# Altium PCB FM375_LQFP64_SOCKET.PcbDoc (part 2 of 3)
Units mil, origin at the board's own origin, x right, y up, seen from the top; angles counter-clockwise.
Board outline 6000 x 4000 mil, 2 copper layers (Top Layer, Bottom Layer); 12 components, 66 nets, 201 pads, 0 vias.
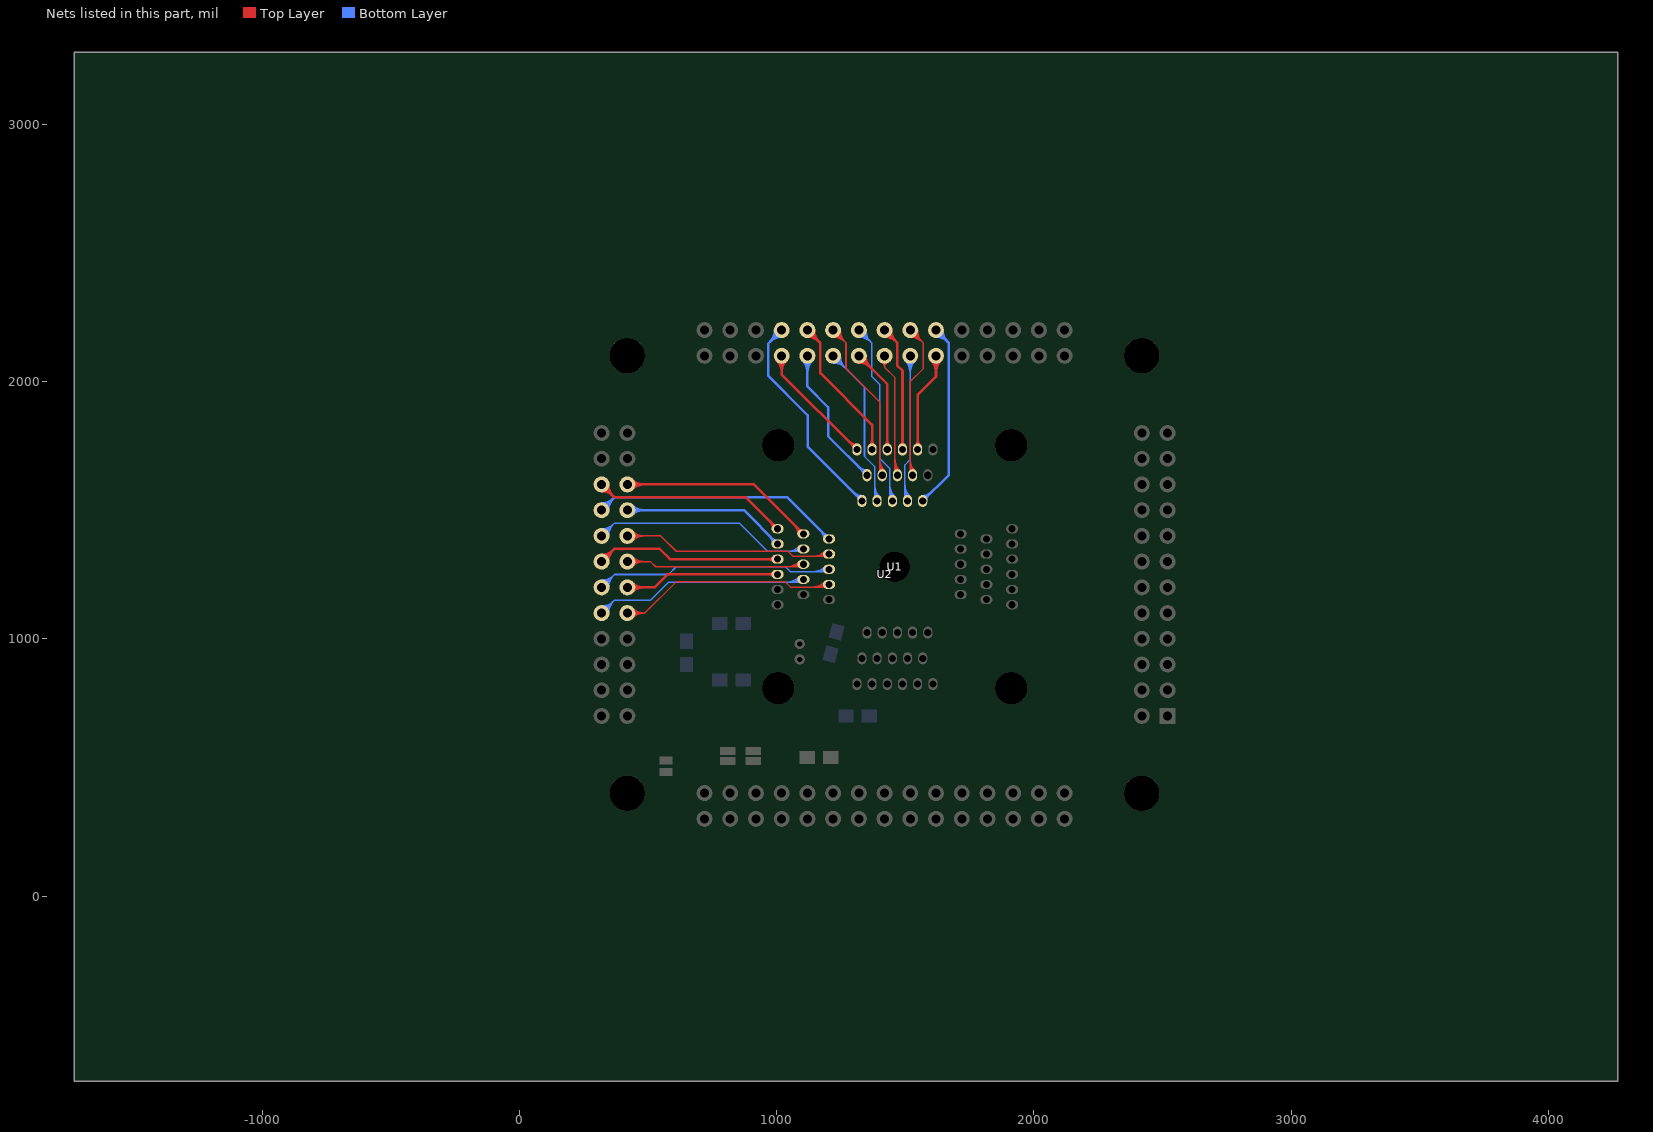
[diagram p2: the nets of this part, all layers, seen from the top]

## Nets (pads, with @x,y where several pads share a name; then routed paths per layer and width w, separated by ;. In a path a pad name is that pad's centre, name@x,y a point inside that pad or via, vN(x,y) a via of type N, cw(c..) or ccw(c..) an arc to the next point about the centre after c; other vN are vias at no path point) (continued)
PC2: U1.19 U2.35 | length 1556.9
  Bottom Layer w10: U1.19@1568.27,1535.91 1670,1637.64 1670,2150 U2.35@1620,2200 ; U1.19@1568.27,1554.53 ccw(c1568.27,1599.49) 1600.06,1567.7 ; U1.19@1568.27,1554.53 ccw(c1568.27,1599.49) 1600.06,1567.7 ; U1.19@1568.27,1554.53 ccw(c1568.27,1599.49) 1600.06,1567.7 ; U1.19@1568.27,1554.53 ccw(c1568.27,1599.49) 1600.06,1567.7 ; U1.19@1580.98,1541.81 cw(c1597.43,1541.81) 1585.8,1553.44 ; U1.19@1580.98,1541.81 cw(c1597.43,1541.81) 1585.8,1553.44 ; U1.19@1580.98,1541.81 cw(c1597.43,1541.81) 1585.8,1553.44 ; U1.19@1580.98,1541.81 cw(c1597.43,1541.81) 1585.8,1553.44 ; U2.35@1620,2174 cw(c1620,2111.23) 1664.38,2155.62 ; U2.35@1620,2174 cw(c1620,2111.23) 1664.38,2155.62 ; U2.35@1620,2174 cw(c1620,2111.23) 1664.38,2155.62 ; U2.35@1620,2174 cw(c1620,2111.23) 1664.38,2155.62 ; U2.35@1620,2184 cw(c1620,2145.37) 1647.31,2172.69 ; U2.35@1620,2184 cw(c1620,2145.37) 1647.31,2172.69 ; U2.35@1620,2184 cw(c1620,2145.37) 1647.31,2172.69 ; U2.35@1620,2184 cw(c1620,2145.37) 1647.31,2172.69 ; U2.35@1636,2200 ccw(c1674.63,2200) 1647.31,2172.69 ; U2.35@1636,2200 ccw(c1674.63,2200) 1647.31,2172.69 ; U2.35@1636,2200 ccw(c1674.63,2200) 1647.31,2172.69 ; U2.35@1636,2200 ccw(c1674.63,2200) 1647.31,2172.69 ; U2.35@1646,2200 ccw(c1708.77,2200) 1664.38,2155.62 ; U2.35@1646,2200 ccw(c1708.77,2200) 1664.38,2155.62 ; U2.35@1646,2200 ccw(c1708.77,2200) 1664.38,2155.62 ; U2.35@1646,2200 ccw(c1708.77,2200) 1664.38,2155.62
PC3: U1.20 U2.36 | length 1223.7
  Top Layer w10: U1.20@1548.58,1735.91 1548.58,1947.58 1620,2019 U2.36@1620,2100 ; U1.20@1539.59,1750.8 ccw(c1517.88,1772.51) 1548.58,1772.51 ; U1.20@1539.59,1750.8 ccw(c1517.88,1772.51) 1548.58,1772.51 ; U1.20@1539.59,1750.8 ccw(c1517.88,1772.51) 1548.58,1772.51 ; U1.20@1539.59,1750.8 ccw(c1517.88,1772.51) 1548.58,1772.51 ; 1548.58,1772.51 ccw(c1579.28,1772.51) U1.20@1557.57,1750.8 ; 1548.58,1772.51 ccw(c1579.28,1772.51) U1.20@1557.57,1750.8 ; 1548.58,1772.51 ccw(c1579.28,1772.51) U1.20@1557.57,1750.8 ; 1548.58,1772.51 ccw(c1579.28,1772.51) U1.20@1557.57,1750.8 ; U2.36@1601.62,2081.62 cw(c1557.23,2037.23) 1620,2037.23 ; U2.36@1601.62,2081.62 cw(c1557.23,2037.23) 1620,2037.23 ; U2.36@1601.62,2081.62 cw(c1557.23,2037.23) 1620,2037.23 ; U2.36@1601.62,2081.62 cw(c1557.23,2037.23) 1620,2037.23 ; U2.36@1608.69,2088.69 cw(c1581.37,2061.37) 1620,2061.37 ; U2.36@1608.69,2088.69 cw(c1581.37,2061.37) 1620,2061.37 ; U2.36@1608.69,2088.69 cw(c1581.37,2061.37) 1620,2061.37 ; U2.36@1608.69,2088.69 cw(c1581.37,2061.37) 1620,2061.37 ; 1620,2037.23 cw(c1682.77,2037.23) U2.36@1638.38,2081.62 ; 1620,2037.23 cw(c1682.77,2037.23) U2.36@1638.38,2081.62 ; 1620,2037.23 cw(c1682.77,2037.23) U2.36@1638.38,2081.62 ; 1620,2037.23 cw(c1682.77,2037.23) U2.36@1638.38,2081.62 ; 1620,2061.37 cw(c1658.63,2061.37) U2.36@1631.31,2088.69 ; 1620,2061.37 cw(c1658.63,2061.37) U2.36@1631.31,2088.69 ; 1620,2061.37 cw(c1658.63,2061.37) U2.36@1631.31,2088.69 ; 1620,2061.37 cw(c1658.63,2061.37) U2.36@1631.31,2088.69
PC4: U1.21 U2.37 | length 2222.7
  Top Layer w6: U1.21@1520,1644.8 U1.21@1528.9,1635.91 1519,1645.8 1519,1999 1571,2051 1571,2149 U2.37@1520,2200 ; 1519,1657.78 ccw(c1544.87,1657.78) U1.21@1526.58,1639.49 ; 1519,1657.78 ccw(c1544.87,1657.78) U1.21@1526.58,1639.49 ; 1519,1657.78 ccw(c1544.87,1657.78) U1.21@1526.58,1639.49 ; 1519,1657.78 ccw(c1544.87,1657.78) U1.21@1526.58,1639.49 ; 1519,1672.26 ccw(c1559.35,1672.26) U1.21@1530.82,1643.73 ; 1519,1672.26 ccw(c1559.35,1672.26) U1.21@1530.82,1643.73 ; 1519,1672.26 ccw(c1559.35,1672.26) U1.21@1530.82,1643.73 ; 1519,1672.26 ccw(c1559.35,1672.26) U1.21@1530.82,1643.73 ; 1519,1686.75 ccw(c1573.84,1686.75) U1.21@1535.06,1647.97 ; 1519,1686.75 ccw(c1573.84,1686.75) U1.21@1535.06,1647.97 ; 1519,1686.75 ccw(c1573.84,1686.75) U1.21@1535.06,1647.97 ; 1519,1686.75 ccw(c1573.84,1686.75) U1.21@1535.06,1647.97 ; 1519,1701.23 ccw(c1588.32,1701.23) U1.21@1539.3,1652.22 ; 1519,1701.23 ccw(c1588.32,1701.23) U1.21@1539.3,1652.22 ; 1519,1701.23 ccw(c1588.32,1701.23) U1.21@1539.3,1652.22 ; 1519,1701.23 ccw(c1588.32,1701.23) U1.21@1539.3,1652.22 ; U2.37@1520,2172 cw(c1520,2104.4) 1567.8,2152.2 ; U2.37@1520,2172 cw(c1520,2104.4) 1567.8,2152.2 ; U2.37@1520,2172 cw(c1520,2104.4) 1567.8,2152.2 ; U2.37@1520,2172 cw(c1520,2104.4) 1567.8,2152.2 ; U2.37@1520,2178 cw(c1520,2124.89) 1557.56,2162.44 ; U2.37@1520,2178 cw(c1520,2124.89) 1557.56,2162.44 ; U2.37@1520,2178 cw(c1520,2124.89) 1557.56,2162.44 ; U2.37@1520,2178 cw(c1520,2124.89) 1557.56,2162.44 ; U2.37@1520,2184 cw(c1520,2145.37) 1547.31,2172.69 ; U2.37@1520,2184 cw(c1520,2145.37) 1547.31,2172.69 ; U2.37@1520,2184 cw(c1520,2145.37) 1547.31,2172.69 ; U2.37@1520,2184 cw(c1520,2145.37) 1547.31,2172.69 ; U2.37@1536,2200 ccw(c1574.63,2200) 1547.31,2172.69 ; U2.37@1536,2200 ccw(c1574.63,2200) 1547.31,2172.69 ; U2.37@1536,2200 ccw(c1574.63,2200) 1547.31,2172.69 ; U2.37@1536,2200 ccw(c1574.63,2200) 1547.31,2172.69 ; U2.37@1542,2200 ccw(c1595.11,2200) 1557.56,2162.44 ; U2.37@1542,2200 ccw(c1595.11,2200) 1557.56,2162.44 ; U2.37@1542,2200 ccw(c1595.11,2200) 1557.56,2162.44 ; U2.37@1542,2200 ccw(c1595.11,2200) 1557.56,2162.44 ; U2.37@1548,2200 ccw(c1615.6,2200) 1567.8,2152.2 ; U2.37@1548,2200 ccw(c1615.6,2200) 1567.8,2152.2 ; U2.37@1548,2200 ccw(c1615.6,2200) 1567.8,2152.2 ; U2.37@1548,2200 ccw(c1615.6,2200) 1567.8,2152.2
PC5: U1.22 U2.38 | length 2209.1
  Bottom Layer w6: U1.22@1509.21,1535.91 1499,1546.12 1499,1676 1519,1696 1519,2099 U2.38@1520,2100 ; 1499,1558.54 ccw(c1525.94,1558.54) U1.22@1506.89,1539.49 ; 1499,1558.54 ccw(c1525.94,1558.54) U1.22@1506.89,1539.49 ; 1499,1558.54 ccw(c1525.94,1558.54) U1.22@1506.89,1539.49 ; 1499,1558.54 ccw(c1525.94,1558.54) U1.22@1506.89,1539.49 ; 1499,1573.02 ccw(c1540.43,1573.02) U1.22@1511.13,1543.73 ; 1499,1573.02 ccw(c1540.43,1573.02) U1.22@1511.13,1543.73 ; 1499,1573.02 ccw(c1540.43,1573.02) U1.22@1511.13,1543.73 ; 1499,1573.02 ccw(c1540.43,1573.02) U1.22@1511.13,1543.73 ; 1499,1587.51 ccw(c1554.91,1587.51) U1.22@1515.38,1547.97 ; 1499,1587.51 ccw(c1554.91,1587.51) U1.22@1515.38,1547.97 ; 1499,1587.51 ccw(c1554.91,1587.51) U1.22@1515.38,1547.97 ; 1499,1587.51 ccw(c1554.91,1587.51) U1.22@1515.38,1547.97 ; 1499,1602 ccw(c1569.4,1602) U1.22@1519.62,1552.22 ; 1499,1602 ccw(c1569.4,1602) U1.22@1519.62,1552.22 ; 1499,1602 ccw(c1569.4,1602) U1.22@1519.62,1552.22 ; 1499,1602 ccw(c1569.4,1602) U1.22@1519.62,1552.22 ; U2.38@1500.2,2080.2 cw(c1454.82,2034.82) 1519,2034.82 ; U2.38@1500.2,2080.2 cw(c1454.82,2034.82) 1519,2034.82 ; U2.38@1500.2,2080.2 cw(c1454.82,2034.82) 1519,2034.82 ; U2.38@1500.2,2080.2 cw(c1454.82,2034.82) 1519,2034.82 ; U2.38@1504.44,2084.44 cw(c1469.3,2049.3) 1519,2049.3 ; U2.38@1504.44,2084.44 cw(c1469.3,2049.3) 1519,2049.3 ; U2.38@1504.44,2084.44 cw(c1469.3,2049.3) 1519,2049.3 ; U2.38@1504.44,2084.44 cw(c1469.3,2049.3) 1519,2049.3 ; U2.38@1508.69,2088.69 cw(c1483.79,2063.79) 1519,2063.79 ; U2.38@1508.69,2088.69 cw(c1483.79,2063.79) 1519,2063.79 ; U2.38@1508.69,2088.69 cw(c1483.79,2063.79) 1519,2063.79 ; U2.38@1508.69,2088.69 cw(c1483.79,2063.79) 1519,2063.79 ; 1519,2029.99 cw(c1590.01,2029.99) U2.38@1539.8,2080.2 ; 1519,2029.99 cw(c1590.01,2029.99) U2.38@1539.8,2080.2 ; 1519,2029.99 cw(c1590.01,2029.99) U2.38@1539.8,2080.2 ; 1519,2029.99 cw(c1590.01,2029.99) U2.38@1539.8,2080.2 ; 1519,2044.47 cw(c1575.53,2044.47) U2.38@1535.56,2084.44 ; 1519,2044.47 cw(c1575.53,2044.47) U2.38@1535.56,2084.44 ; 1519,2044.47 cw(c1575.53,2044.47) U2.38@1535.56,2084.44 ; 1519,2044.47 cw(c1575.53,2044.47) U2.38@1535.56,2084.44 ; 1519,2058.96 cw(c1561.04,2058.96) U2.38@1531.31,2088.69 ; 1519,2058.96 cw(c1561.04,2058.96) U2.38@1531.31,2088.69 ; 1519,2058.96 cw(c1561.04,2058.96) U2.38@1531.31,2088.69 ; 1519,2058.96 cw(c1561.04,2058.96) U2.38@1531.31,2088.69
  Bottom Layer w10: U1.22@1509.21,1535.91 U1.22@1509.21,1555.21
PC6: U1.23 U2.39 | length 1322.9
  Top Layer w10: U2.39@1420,2200 1469,2151 1469,2063 1489.53,2042.47 U1.23@1489.53,1735.91 ; U2.39@1420,2174 cw(c1420,2111.23) 1464.38,2155.62 ; U2.39@1420,2174 cw(c1420,2111.23) 1464.38,2155.62 ; U2.39@1420,2174 cw(c1420,2111.23) 1464.38,2155.62 ; U2.39@1420,2174 cw(c1420,2111.23) 1464.38,2155.62 ; U2.39@1420,2184 cw(c1420,2145.37) 1447.31,2172.69 ; U2.39@1420,2184 cw(c1420,2145.37) 1447.31,2172.69 ; U2.39@1420,2184 cw(c1420,2145.37) 1447.31,2172.69 ; U2.39@1420,2184 cw(c1420,2145.37) 1447.31,2172.69 ; U2.39@1436,2200 ccw(c1474.63,2200) 1447.31,2172.69 ; U2.39@1436,2200 ccw(c1474.63,2200) 1447.31,2172.69 ; U2.39@1436,2200 ccw(c1474.63,2200) 1447.31,2172.69 ; U2.39@1436,2200 ccw(c1474.63,2200) 1447.31,2172.69 ; U2.39@1446,2200 ccw(c1508.77,2200) 1464.38,2155.62 ; U2.39@1446,2200 ccw(c1508.77,2200) 1464.38,2155.62 ; U2.39@1446,2200 ccw(c1508.77,2200) 1464.38,2155.62 ; U2.39@1446,2200 ccw(c1508.77,2200) 1464.38,2155.62 ; U1.23@1480.54,1750.8 ccw(c1458.83,1772.51) 1489.53,1772.51 ; U1.23@1480.54,1750.8 ccw(c1458.83,1772.51) 1489.53,1772.51 ; U1.23@1480.54,1750.8 ccw(c1458.83,1772.51) 1489.53,1772.51 ; U1.23@1480.54,1750.8 ccw(c1458.83,1772.51) 1489.53,1772.51 ; 1489.53,1772.51 ccw(c1520.23,1772.51) U1.23@1498.52,1750.8 ; 1489.53,1772.51 ccw(c1520.23,1772.51) U1.23@1498.52,1750.8 ; 1489.53,1772.51 ccw(c1520.23,1772.51) U1.23@1498.52,1750.8 ; 1489.53,1772.51 ccw(c1520.23,1772.51) U1.23@1498.52,1750.8
PC7: U1.24 U2.40 | length 1413.5
  Top Layer w6: U2.40@1420,2100 1420,2056 ; U1.24@1469.84,1635.91 1460,1645.75 1460,2016 1420,2056 ; U2.40@1408.14,2074.63 cw(c1399.43,2056) 1420,2056 ; U2.40@1408.14,2074.63 cw(c1399.43,2056) 1420,2056 ; U2.40@1408.14,2074.63 cw(c1399.43,2056) 1420,2056 ; U2.40@1408.14,2074.63 cw(c1399.43,2056) 1420,2056 ; U2.40@1410.68,2080.07 cw(c1403.84,2065.43) 1420,2065.43 ; U2.40@1410.68,2080.07 cw(c1403.84,2065.43) 1420,2065.43 ; U2.40@1410.68,2080.07 cw(c1403.84,2065.43) 1420,2065.43 ; U2.40@1410.68,2080.07 cw(c1403.84,2065.43) 1420,2065.43 ; 1420,2056 cw(c1440.57,2056) U2.40@1431.86,2074.63 ; 1420,2056 cw(c1440.57,2056) U2.40@1431.86,2074.63 ; 1420,2056 cw(c1440.57,2056) U2.40@1431.86,2074.63 ; 1420,2056 cw(c1440.57,2056) U2.40@1431.86,2074.63 ; 1420,2065.43 cw(c1436.16,2065.43) U2.40@1429.32,2080.07 ; 1420,2065.43 cw(c1436.16,2065.43) U2.40@1429.32,2080.07 ; 1420,2065.43 cw(c1436.16,2065.43) U2.40@1429.32,2080.07 ; 1420,2065.43 cw(c1436.16,2065.43) U2.40@1429.32,2080.07 ; 1460,1657.65 ccw(c1485.68,1657.65) U1.24@1467.52,1639.49 ; 1460,1657.65 ccw(c1485.68,1657.65) U1.24@1467.52,1639.49 ; 1460,1657.65 ccw(c1485.68,1657.65) U1.24@1467.52,1639.49 ; 1460,1657.65 ccw(c1485.68,1657.65) U1.24@1467.52,1639.49 ; 1460,1672.13 ccw(c1500.16,1672.13) U1.24@1471.76,1643.73 ; 1460,1672.13 ccw(c1500.16,1672.13) U1.24@1471.76,1643.73 ; 1460,1672.13 ccw(c1500.16,1672.13) U1.24@1471.76,1643.73 ; 1460,1672.13 ccw(c1500.16,1672.13) U1.24@1471.76,1643.73 ; 1460,1686.62 ccw(c1514.65,1686.62) U1.24@1476.01,1647.97 ; 1460,1686.62 ccw(c1514.65,1686.62) U1.24@1476.01,1647.97 ; 1460,1686.62 ccw(c1514.65,1686.62) U1.24@1476.01,1647.97 ; 1460,1686.62 ccw(c1514.65,1686.62) U1.24@1476.01,1647.97 ; 1460,1701.1 ccw(c1529.13,1701.1) U1.24@1480.25,1652.22 ; 1460,1701.1 ccw(c1529.13,1701.1) U1.24@1480.25,1652.22 ; 1460,1701.1 ccw(c1529.13,1701.1) U1.24@1480.25,1652.22 ; 1460,1701.1 ccw(c1529.13,1701.1) U1.24@1480.25,1652.22
PD0: U1.25 U2.41 | length 2328.4
  Bottom Layer w6: U2.41@1320,2200 1370,2150 1370,2020 1401,1989 1401,1701 1440,1662 1440,1546.06 U1.25@1450.16,1535.91 ; U2.41@1320,2172 cw(c1320,2104.4) 1367.8,2152.2 ; U2.41@1320,2172 cw(c1320,2104.4) 1367.8,2152.2 ; U2.41@1320,2172 cw(c1320,2104.4) 1367.8,2152.2 ; U2.41@1320,2172 cw(c1320,2104.4) 1367.8,2152.2 ; U2.41@1320,2178 cw(c1320,2124.89) 1357.56,2162.44 ; U2.41@1320,2178 cw(c1320,2124.89) 1357.56,2162.44 ; U2.41@1320,2178 cw(c1320,2124.89) 1357.56,2162.44 ; U2.41@1320,2178 cw(c1320,2124.89) 1357.56,2162.44 ; U2.41@1320,2184 cw(c1320,2145.37) 1347.31,2172.69 ; U2.41@1320,2184 cw(c1320,2145.37) 1347.31,2172.69 ; U2.41@1320,2184 cw(c1320,2145.37) 1347.31,2172.69 ; U2.41@1320,2184 cw(c1320,2145.37) 1347.31,2172.69 ; U2.41@1336,2200 ccw(c1374.63,2200) 1347.31,2172.69 ; U2.41@1336,2200 ccw(c1374.63,2200) 1347.31,2172.69 ; U2.41@1336,2200 ccw(c1374.63,2200) 1347.31,2172.69 ; U2.41@1336,2200 ccw(c1374.63,2200) 1347.31,2172.69 ; U2.41@1342,2200 ccw(c1395.11,2200) 1357.56,2162.44 ; U2.41@1342,2200 ccw(c1395.11,2200) 1357.56,2162.44 ; U2.41@1342,2200 ccw(c1395.11,2200) 1357.56,2162.44 ; U2.41@1342,2200 ccw(c1395.11,2200) 1357.56,2162.44 ; U2.41@1348,2200 ccw(c1415.6,2200) 1367.8,2152.2 ; U2.41@1348,2200 ccw(c1415.6,2200) 1367.8,2152.2 ; U2.41@1348,2200 ccw(c1415.6,2200) 1367.8,2152.2 ; U2.41@1348,2200 ccw(c1415.6,2200) 1367.8,2152.2 ; 1440,1558.41 ccw(c1466.75,1558.41) U1.25@1447.84,1539.49 ; 1440,1558.41 ccw(c1466.75,1558.41) U1.25@1447.84,1539.49 ; 1440,1558.41 ccw(c1466.75,1558.41) U1.25@1447.84,1539.49 ; 1440,1558.41 ccw(c1466.75,1558.41) U1.25@1447.84,1539.49 ; 1440,1572.89 ccw(c1481.24,1572.89) U1.25@1452.08,1543.73 ; 1440,1572.89 ccw(c1481.24,1572.89) U1.25@1452.08,1543.73 ; 1440,1572.89 ccw(c1481.24,1572.89) U1.25@1452.08,1543.73 ; 1440,1572.89 ccw(c1481.24,1572.89) U1.25@1452.08,1543.73 ; 1440,1587.38 ccw(c1495.72,1587.38) U1.25@1456.32,1547.97 ; 1440,1587.38 ccw(c1495.72,1587.38) U1.25@1456.32,1547.97 ; 1440,1587.38 ccw(c1495.72,1587.38) U1.25@1456.32,1547.97 ; 1440,1587.38 ccw(c1495.72,1587.38) U1.25@1456.32,1547.97 ; 1440,1601.86 ccw(c1510.21,1601.86) U1.25@1460.56,1552.22 ; 1440,1601.86 ccw(c1510.21,1601.86) U1.25@1460.56,1552.22 ; 1440,1601.86 ccw(c1510.21,1601.86) U1.25@1460.56,1552.22 ; 1440,1601.86 ccw(c1510.21,1601.86) U1.25@1460.56,1552.22
PD1: U1.26 U2.42 | length 1239.8
  Top Layer w10: U2.42@1320,2100 1430.47,1989.53 U1.26@1430.47,1735.91 ; U2.42@1320,2074 cw(c1320,2011.23) 1364.38,2055.62 ; U2.42@1320,2074 cw(c1320,2011.23) 1364.38,2055.62 ; U2.42@1320,2074 cw(c1320,2011.23) 1364.38,2055.62 ; U2.42@1320,2074 cw(c1320,2011.23) 1364.38,2055.62 ; U2.42@1320,2084 cw(c1320,2045.37) 1347.31,2072.69 ; U2.42@1320,2084 cw(c1320,2045.37) 1347.31,2072.69 ; U2.42@1320,2084 cw(c1320,2045.37) 1347.31,2072.69 ; U2.42@1320,2084 cw(c1320,2045.37) 1347.31,2072.69 ; U2.42@1336,2100 ccw(c1374.63,2100) 1347.31,2072.69 ; U2.42@1336,2100 ccw(c1374.63,2100) 1347.31,2072.69 ; U2.42@1336,2100 ccw(c1374.63,2100) 1347.31,2072.69 ; U2.42@1336,2100 ccw(c1374.63,2100) 1347.31,2072.69 ; U2.42@1346,2100 ccw(c1408.77,2100) 1364.38,2055.62 ; U2.42@1346,2100 ccw(c1408.77,2100) 1364.38,2055.62 ; U2.42@1346,2100 ccw(c1408.77,2100) 1364.38,2055.62 ; U2.42@1346,2100 ccw(c1408.77,2100) 1364.38,2055.62 ; U1.26@1421.48,1750.8 ccw(c1399.77,1772.51) 1430.47,1772.51 ; U1.26@1421.48,1750.8 ccw(c1399.77,1772.51) 1430.47,1772.51 ; U1.26@1421.48,1750.8 ccw(c1399.77,1772.51) 1430.47,1772.51 ; U1.26@1421.48,1750.8 ccw(c1399.77,1772.51) 1430.47,1772.51 ; 1430.47,1772.51 ccw(c1461.17,1772.51) U1.26@1439.46,1750.8 ; 1430.47,1772.51 ccw(c1461.17,1772.51) U1.26@1439.46,1750.8 ; 1430.47,1772.51 ccw(c1461.17,1772.51) U1.26@1439.46,1750.8 ; 1430.47,1772.51 ccw(c1461.17,1772.51) U1.26@1439.46,1750.8
PD2: U1.27 U2.43 | length 2250
  Top Layer w6: U2.43@1220,2200 1270,2150 1270,2052 1401,1921 1401,1645.69 U1.27@1410.79,1635.91 U1.27@1402,1644.69 ; U2.43@1220,2172 cw(c1220,2104.4) 1267.8,2152.2 ; U2.43@1220,2172 cw(c1220,2104.4) 1267.8,2152.2 ; U2.43@1220,2172 cw(c1220,2104.4) 1267.8,2152.2 ; U2.43@1220,2172 cw(c1220,2104.4) 1267.8,2152.2 ; U2.43@1220,2178 cw(c1220,2124.89) 1257.56,2162.44 ; U2.43@1220,2178 cw(c1220,2124.89) 1257.56,2162.44 ; U2.43@1220,2178 cw(c1220,2124.89) 1257.56,2162.44 ; U2.43@1220,2178 cw(c1220,2124.89) 1257.56,2162.44 ; U2.43@1220,2184 cw(c1220,2145.37) 1247.31,2172.69 ; U2.43@1220,2184 cw(c1220,2145.37) 1247.31,2172.69 ; U2.43@1220,2184 cw(c1220,2145.37) 1247.31,2172.69 ; U2.43@1220,2184 cw(c1220,2145.37) 1247.31,2172.69 ; U2.43@1236,2200 ccw(c1274.63,2200) 1247.31,2172.69 ; U2.43@1236,2200 ccw(c1274.63,2200) 1247.31,2172.69 ; U2.43@1236,2200 ccw(c1274.63,2200) 1247.31,2172.69 ; U2.43@1236,2200 ccw(c1274.63,2200) 1247.31,2172.69 ; U2.43@1242,2200 ccw(c1295.11,2200) 1257.56,2162.44 ; U2.43@1242,2200 ccw(c1295.11,2200) 1257.56,2162.44 ; U2.43@1242,2200 ccw(c1295.11,2200) 1257.56,2162.44 ; U2.43@1242,2200 ccw(c1295.11,2200) 1257.56,2162.44 ; U2.43@1248,2200 ccw(c1315.6,2200) 1267.8,2152.2 ; U2.43@1248,2200 ccw(c1315.6,2200) 1267.8,2152.2 ; U2.43@1248,2200 ccw(c1315.6,2200) 1267.8,2152.2 ; U2.43@1248,2200 ccw(c1315.6,2200) 1267.8,2152.2 ; 1401,1657.51 ccw(c1426.49,1657.51) U1.27@1408.47,1639.49 ; 1401,1657.51 ccw(c1426.49,1657.51) U1.27@1408.47,1639.49 ; 1401,1657.51 ccw(c1426.49,1657.51) U1.27@1408.47,1639.49 ; 1401,1657.51 ccw(c1426.49,1657.51) U1.27@1408.47,1639.49 ; 1401,1672 ccw(c1440.97,1672) U1.27@1412.71,1643.73 ; 1401,1672 ccw(c1440.97,1672) U1.27@1412.71,1643.73 ; 1401,1672 ccw(c1440.97,1672) U1.27@1412.71,1643.73 ; 1401,1672 ccw(c1440.97,1672) U1.27@1412.71,1643.73 ; 1401,1686.48 ccw(c1455.46,1686.48) U1.27@1416.95,1647.97 ; 1401,1686.48 ccw(c1455.46,1686.48) U1.27@1416.95,1647.97 ; 1401,1686.48 ccw(c1455.46,1686.48) U1.27@1416.95,1647.97 ; 1401,1686.48 ccw(c1455.46,1686.48) U1.27@1416.95,1647.97 ; 1401,1700.97 ccw(c1469.94,1700.97) U1.27@1421.19,1652.22 ; 1401,1700.97 ccw(c1469.94,1700.97) U1.27@1421.19,1652.22 ; 1401,1700.97 ccw(c1469.94,1700.97) U1.27@1421.19,1652.22 ; 1401,1700.97 ccw(c1469.94,1700.97) U1.27@1421.19,1652.22
PD3: U1.28 U2.44 | length 2259
  Bottom Layer w6: U2.44@1220,2100 1342,1978 1342,1709 1381,1670 1381,1546.01 U1.28@1391.1,1535.91 ; U2.44@1220,2072 cw(c1220,2004.4) 1267.8,2052.2 ; U2.44@1220,2072 cw(c1220,2004.4) 1267.8,2052.2 ; U2.44@1220,2072 cw(c1220,2004.4) 1267.8,2052.2 ; U2.44@1220,2072 cw(c1220,2004.4) 1267.8,2052.2 ; U2.44@1220,2078 cw(c1220,2024.89) 1257.56,2062.44 ; U2.44@1220,2078 cw(c1220,2024.89) 1257.56,2062.44 ; U2.44@1220,2078 cw(c1220,2024.89) 1257.56,2062.44 ; U2.44@1220,2078 cw(c1220,2024.89) 1257.56,2062.44 ; U2.44@1220,2084 cw(c1220,2045.37) 1247.31,2072.69 ; U2.44@1220,2084 cw(c1220,2045.37) 1247.31,2072.69 ; U2.44@1220,2084 cw(c1220,2045.37) 1247.31,2072.69 ; U2.44@1220,2084 cw(c1220,2045.37) 1247.31,2072.69 ; U2.44@1236,2100 ccw(c1274.63,2100) 1247.31,2072.69 ; U2.44@1236,2100 ccw(c1274.63,2100) 1247.31,2072.69 ; U2.44@1236,2100 ccw(c1274.63,2100) 1247.31,2072.69 ; U2.44@1236,2100 ccw(c1274.63,2100) 1247.31,2072.69 ; U2.44@1242,2100 ccw(c1295.11,2100) 1257.56,2062.44 ; U2.44@1242,2100 ccw(c1295.11,2100) 1257.56,2062.44 ; U2.44@1242,2100 ccw(c1295.11,2100) 1257.56,2062.44 ; U2.44@1242,2100 ccw(c1295.11,2100) 1257.56,2062.44 ; U2.44@1248,2100 ccw(c1315.6,2100) 1267.8,2052.2 ; U2.44@1248,2100 ccw(c1315.6,2100) 1267.8,2052.2 ; U2.44@1248,2100 ccw(c1315.6,2100) 1267.8,2052.2 ; U2.44@1248,2100 ccw(c1315.6,2100) 1267.8,2052.2 ; 1381,1558.27 ccw(c1407.56,1558.27) U1.28@1388.78,1539.49 ; 1381,1558.27 ccw(c1407.56,1558.27) U1.28@1388.78,1539.49 ; 1381,1558.27 ccw(c1407.56,1558.27) U1.28@1388.78,1539.49 ; 1381,1558.27 ccw(c1407.56,1558.27) U1.28@1388.78,1539.49 ; 1381,1572.76 ccw(c1422.05,1572.76) U1.28@1393.02,1543.73 ; 1381,1572.76 ccw(c1422.05,1572.76) U1.28@1393.02,1543.73 ; 1381,1572.76 ccw(c1422.05,1572.76) U1.28@1393.02,1543.73 ; 1381,1572.76 ccw(c1422.05,1572.76) U1.28@1393.02,1543.73 ; 1381,1587.24 ccw(c1436.54,1587.24) U1.28@1397.27,1547.97 ; 1381,1587.24 ccw(c1436.54,1587.24) U1.28@1397.27,1547.97 ; 1381,1587.24 ccw(c1436.54,1587.24) U1.28@1397.27,1547.97 ; 1381,1587.24 ccw(c1436.54,1587.24) U1.28@1397.27,1547.97 ; 1381,1601.73 ccw(c1451.02,1601.73) U1.28@1401.51,1552.22 ; 1381,1601.73 ccw(c1451.02,1601.73) U1.28@1401.51,1552.22 ; 1381,1601.73 ccw(c1451.02,1601.73) U1.28@1401.51,1552.22 ; 1381,1601.73 ccw(c1451.02,1601.73) U1.28@1401.51,1552.22
  Bottom Layer w10: U1.28@1391.1,1535.91 U1.28@1391.1,1551.9
PD4: U1.29 U2.45 | length 1398.2
  Top Layer w10: U2.45@1120,2200 1170,2150 1170,2033 1371.42,1831.58 U1.29@1371.42,1735.91 ; U2.45@1120,2174 cw(c1120,2111.23) 1164.38,2155.62 ; U2.45@1120,2174 cw(c1120,2111.23) 1164.38,2155.62 ; U2.45@1120,2174 cw(c1120,2111.23) 1164.38,2155.62 ; U2.45@1120,2174 cw(c1120,2111.23) 1164.38,2155.62 ; U2.45@1120,2184 cw(c1120,2145.37) 1147.31,2172.69 ; U2.45@1120,2184 cw(c1120,2145.37) 1147.31,2172.69 ; U2.45@1120,2184 cw(c1120,2145.37) 1147.31,2172.69 ; U2.45@1120,2184 cw(c1120,2145.37) 1147.31,2172.69 ; U2.45@1136,2200 ccw(c1174.63,2200) 1147.31,2172.69 ; U2.45@1136,2200 ccw(c1174.63,2200) 1147.31,2172.69 ; U2.45@1136,2200 ccw(c1174.63,2200) 1147.31,2172.69 ; U2.45@1136,2200 ccw(c1174.63,2200) 1147.31,2172.69 ; U2.45@1146,2200 ccw(c1208.77,2200) 1164.38,2155.62 ; U2.45@1146,2200 ccw(c1208.77,2200) 1164.38,2155.62 ; U2.45@1146,2200 ccw(c1208.77,2200) 1164.38,2155.62 ; U2.45@1146,2200 ccw(c1208.77,2200) 1164.38,2155.62 ; U1.29@1362.43,1750.8 ccw(c1340.72,1772.51) 1371.42,1772.51 ; U1.29@1362.43,1750.8 ccw(c1340.72,1772.51) 1371.42,1772.51 ; U1.29@1362.43,1750.8 ccw(c1340.72,1772.51) 1371.42,1772.51 ; U1.29@1362.43,1750.8 ccw(c1340.72,1772.51) 1371.42,1772.51 ; 1371.42,1772.51 ccw(c1402.12,1772.51) U1.29@1380.41,1750.8 ; 1371.42,1772.51 ccw(c1402.12,1772.51) U1.29@1380.41,1750.8 ; 1371.42,1772.51 ccw(c1402.12,1772.51) U1.29@1380.41,1750.8 ; 1371.42,1772.51 ccw(c1402.12,1772.51) U1.29@1380.41,1750.8
PD5: U1.30 U2.46 | length 1403.8
  Top Layer w6: U1.30@1342,1645.64 U1.30@1351.73,1635.91
  Bottom Layer w10: U2.46@1120,2100 1120,1981 1201,1900 1201,1786.64 U1.30@1351.73,1635.91 ; U2.46@1101.62,2081.62 cw(c1057.23,2037.23) 1120,2037.23 ; U2.46@1101.62,2081.62 cw(c1057.23,2037.23) 1120,2037.23 ; U2.46@1101.62,2081.62 cw(c1057.23,2037.23) 1120,2037.23 ; U2.46@1101.62,2081.62 cw(c1057.23,2037.23) 1120,2037.23 ; U2.46@1108.69,2088.69 cw(c1081.37,2061.37) 1120,2061.37 ; U2.46@1108.69,2088.69 cw(c1081.37,2061.37) 1120,2061.37 ; U2.46@1108.69,2088.69 cw(c1081.37,2061.37) 1120,2061.37 ; U2.46@1108.69,2088.69 cw(c1081.37,2061.37) 1120,2061.37 ; 1120,2037.23 cw(c1182.77,2037.23) U2.46@1138.38,2081.62 ; 1120,2037.23 cw(c1182.77,2037.23) U2.46@1138.38,2081.62 ; 1120,2037.23 cw(c1182.77,2037.23) U2.46@1138.38,2081.62 ; 1120,2037.23 cw(c1182.77,2037.23) U2.46@1138.38,2081.62 ; 1120,2061.37 cw(c1158.63,2061.37) U2.46@1131.31,2088.69 ; 1120,2061.37 cw(c1158.63,2061.37) U2.46@1131.31,2088.69 ; 1120,2061.37 cw(c1158.63,2061.37) U2.46@1131.31,2088.69 ; 1120,2061.37 cw(c1158.63,2061.37) U2.46@1131.31,2088.69 ; 1319.94,1667.7 ccw(c1351.73,1699.49) U1.30@1351.73,1654.53 ; 1319.94,1667.7 ccw(c1351.73,1699.49) U1.30@1351.73,1654.53 ; 1319.94,1667.7 ccw(c1351.73,1699.49) U1.30@1351.73,1654.53 ; 1319.94,1667.7 ccw(c1351.73,1699.49) U1.30@1351.73,1654.53 ; 1334.2,1653.44 cw(c1322.57,1641.81) U1.30@1339.02,1641.81 ; 1334.2,1653.44 cw(c1322.57,1641.81) U1.30@1339.02,1641.81 ; 1334.2,1653.44 cw(c1322.57,1641.81) U1.30@1339.02,1641.81 ; 1334.2,1653.44 cw(c1322.57,1641.81) U1.30@1339.02,1641.81
PD6: U1.31 U2.47 | length 1667.2
  Bottom Layer w10: U2.47@1020,2200 967,2147 967,2023 1121,1869 1121,1746.95 U1.31@1332.05,1535.91 ; 975.62,2155.62 cw(c1020,2111.23) U2.47@1020,2174 ; 975.62,2155.62 ccw(c931.23,2200) U2.47@994,2200 ; 975.62,2155.62 cw(c1020,2111.23) U2.47@1020,2174 ; 975.62,2155.62 ccw(c931.23,2200) U2.47@994,2200 ; 975.62,2155.62 ccw(c931.23,2200) U2.47@994,2200 ; 975.62,2155.62 cw(c1020,2111.23) U2.47@1020,2174 ; 975.62,2155.62 ccw(c931.23,2200) U2.47@994,2200 ; 975.62,2155.62 cw(c1020,2111.23) U2.47@1020,2174 ; 992.69,2172.69 cw(c1020,2145.37) U2.47@1020,2184 ; 992.69,2172.69 ccw(c965.37,2200) U2.47@1004,2200 ; 992.69,2172.69 cw(c1020,2145.37) U2.47@1020,2184 ; 992.69,2172.69 ccw(c965.37,2200) U2.47@1004,2200 ; 992.69,2172.69 ccw(c965.37,2200) U2.47@1004,2200 ; 992.69,2172.69 cw(c1020,2145.37) U2.47@1020,2184 ; 992.69,2172.69 ccw(c965.37,2200) U2.47@1004,2200 ; 992.69,2172.69 cw(c1020,2145.37) U2.47@1020,2184 ; 1300.26,1567.7 ccw(c1332.05,1599.49) U1.31@1332.05,1554.53 ; 1300.26,1567.7 ccw(c1332.05,1599.49) U1.31@1332.05,1554.53 ; 1300.26,1567.7 ccw(c1332.05,1599.49) U1.31@1332.05,1554.53 ; 1300.26,1567.7 ccw(c1332.05,1599.49) U1.31@1332.05,1554.53 ; 1314.51,1553.44 cw(c1302.89,1541.81) U1.31@1319.33,1541.81 ; 1314.51,1553.44 cw(c1302.89,1541.81) U1.31@1319.33,1541.81 ; 1314.51,1553.44 cw(c1302.89,1541.81) U1.31@1319.33,1541.81 ; 1314.51,1553.44 cw(c1302.89,1541.81) U1.31@1319.33,1541.81
PD7: U1.32 U2.48 | length 1315.2
  Top Layer w10: U2.48@1020,2100 1020,2028.27 U1.32@1312.36,1735.91 ; U2.48@1001.62,2081.62 cw(c957.23,2037.23) 1020,2037.23 ; U2.48@1001.62,2081.62 cw(c957.23,2037.23) 1020,2037.23 ; U2.48@1001.62,2081.62 cw(c957.23,2037.23) 1020,2037.23 ; U2.48@1001.62,2081.62 cw(c957.23,2037.23) 1020,2037.23 ; U2.48@1008.69,2088.69 cw(c981.37,2061.37) 1020,2061.37 ; U2.48@1008.69,2088.69 cw(c981.37,2061.37) 1020,2061.37 ; U2.48@1008.69,2088.69 cw(c981.37,2061.37) 1020,2061.37 ; U2.48@1008.69,2088.69 cw(c981.37,2061.37) 1020,2061.37 ; 1020,2037.23 cw(c1082.77,2037.23) U2.48@1038.38,2081.62 ; 1020,2037.23 cw(c1082.77,2037.23) U2.48@1038.38,2081.62 ; 1020,2037.23 cw(c1082.77,2037.23) U2.48@1038.38,2081.62 ; 1020,2037.23 cw(c1082.77,2037.23) U2.48@1038.38,2081.62 ; 1020,2061.37 cw(c1058.63,2061.37) U2.48@1031.31,2088.69 ; 1020,2061.37 cw(c1058.63,2061.37) U2.48@1031.31,2088.69 ; 1020,2061.37 cw(c1058.63,2061.37) U2.48@1031.31,2088.69 ; 1020,2061.37 cw(c1058.63,2061.37) U2.48@1031.31,2088.69 ; 1280.57,1767.7 ccw(c1312.36,1799.49) U1.32@1312.36,1754.53 ; 1280.57,1767.7 ccw(c1312.36,1799.49) U1.32@1312.36,1754.53 ; 1280.57,1767.7 ccw(c1312.36,1799.49) U1.32@1312.36,1754.53 ; 1280.57,1767.7 ccw(c1312.36,1799.49) U1.32@1312.36,1754.53 ; 1294.83,1753.44 cw(c1283.2,1741.81) U1.32@1299.65,1741.81 ; 1294.83,1753.44 cw(c1283.2,1741.81) U1.32@1299.65,1741.81 ; 1294.83,1753.44 cw(c1283.2,1741.81) U1.32@1299.65,1741.81 ; 1294.83,1753.44 cw(c1283.2,1741.81) U1.32@1299.65,1741.81
PE0: U1.33 U2.59 | length 963
  Top Layer w10: U2.59@320,1574 cw(c320,1511.23) 364.38,1555.62 cw(c408.77,1600) U2.59@346,1600 ; U2.59@320,1584 cw(c320,1545.37) 347.31,1572.69 cw(c374.63,1600) U2.59@336,1600 ; U2.59@320,1600 370,1550 881.73,1550 U1.33@1004.09,1427.64 ; 972.3,1459.43 cw(c940.51,1427.64) U1.33@985.47,1427.64 ; 986.56,1445.17 ccw(c998.19,1456.8) U1.33@998.19,1440.35
PE1: U1.34 U2.60 | length 971.1
  Top Layer w10: U2.60@420,1600 912.05,1600 U1.34@1104.09,1407.95 ; U2.60@431.31,1588.69 cw(c458.63,1561.37) 458.63,1600 cw(c458.63,1638.63) U2.60@431.31,1611.31 ; U2.60@438.38,1581.62 cw(c482.77,1537.23) 482.77,1600 cw(c482.77,1662.77) U2.60@438.38,1618.38 ; 1072.3,1439.74 cw(c1040.51,1407.95) U1.34@1085.47,1407.95 ; 1086.56,1425.49 ccw(c1098.19,1437.11) U1.34@1098.19,1420.67
PE2: U1.35 U2.61 | length 1179.3
  Bottom Layer w10: U2.61@320,1500 370,1550 1042.36,1550 U1.35@1204.09,1388.27 ; U2.61@320,1516 ccw(c320,1554.63) 347.31,1527.31 ccw(c374.63,1500) U2.61@336,1500 ; U2.61@320,1526 ccw(c320,1588.77) 364.38,1544.38 ccw(c408.77,1500) U2.61@346,1500 ; 1172.3,1420.06 cw(c1140.51,1388.27) U1.35@1185.47,1388.27 ; 1186.56,1405.8 ccw(c1198.19,1417.43) U1.35@1198.19,1400.98
PE3: U1.36 U2.62 | length 1468.5
  Bottom Layer w10: U2.62@420,1500 872.68,1500 U1.36@1004.09,1368.58 ; U2.62@431.31,1488.69 cw(c458.63,1461.37) 458.63,1500 ; U2.62@431.31,1488.69 cw(c458.63,1461.37) 458.63,1500 ; U2.62@431.31,1488.69 cw(c458.63,1461.37) 458.63,1500 ; U2.62@431.31,1488.69 cw(c458.63,1461.37) 458.63,1500 ; U2.62@431.31,1511.31 ccw(c458.63,1538.63) 458.63,1500 ; U2.62@431.31,1511.31 ccw(c458.63,1538.63) 458.63,1500 ; U2.62@431.31,1511.31 ccw(c458.63,1538.63) 458.63,1500 ; U2.62@431.31,1511.31 ccw(c458.63,1538.63) 458.63,1500 ; U2.62@438.38,1481.62 cw(c482.77,1437.23) 482.77,1500 ; U2.62@438.38,1481.62 cw(c482.77,1437.23) 482.77,1500 ; U2.62@438.38,1481.62 cw(c482.77,1437.23) 482.77,1500 ; U2.62@438.38,1481.62 cw(c482.77,1437.23) 482.77,1500 ; U2.62@438.38,1518.38 ccw(c482.77,1562.77) 482.77,1500 ; U2.62@438.38,1518.38 ccw(c482.77,1562.77) 482.77,1500 ; U2.62@438.38,1518.38 ccw(c482.77,1562.77) 482.77,1500 ; U2.62@438.38,1518.38 ccw(c482.77,1562.77) 482.77,1500 ; 972.3,1400.37 cw(c940.51,1368.58) U1.36@985.47,1368.58 ; 972.3,1400.37 cw(c940.51,1368.58) U1.36@985.47,1368.58 ; 972.3,1400.37 cw(c940.51,1368.58) U1.36@985.47,1368.58 ; 972.3,1400.37 cw(c940.51,1368.58) U1.36@985.47,1368.58 ; 986.56,1386.12 ccw(c998.19,1397.74) U1.36@998.19,1381.3 ; 986.56,1386.12 ccw(c998.19,1397.74) U1.36@998.19,1381.3 ; 986.56,1386.12 ccw(c998.19,1397.74) U1.36@998.19,1381.3 ; 986.56,1386.12 ccw(c998.19,1397.74) U1.36@998.19,1381.3
PE4: U1.37 U2.63 | length 2339.8
  Bottom Layer w6: U2.63@320,1400 370,1450 855,1450 965,1340 1095.2,1340 U1.37@1104.09,1348.9 ; U2.63@320,1416 ccw(c320,1454.63) 347.31,1427.31 ; U2.63@320,1416 ccw(c320,1454.63) 347.31,1427.31 ; U2.63@320,1416 ccw(c320,1454.63) 347.31,1427.31 ; U2.63@320,1416 ccw(c320,1454.63) 347.31,1427.31 ; U2.63@320,1422 ccw(c320,1475.11) 357.56,1437.56 ; U2.63@320,1422 ccw(c320,1475.11) 357.56,1437.56 ; U2.63@320,1422 ccw(c320,1475.11) 357.56,1437.56 ; U2.63@320,1422 ccw(c320,1475.11) 357.56,1437.56 ; U2.63@320,1428 ccw(c320,1495.6) 367.8,1447.8 ; U2.63@320,1428 ccw(c320,1495.6) 367.8,1447.8 ; U2.63@320,1428 ccw(c320,1495.6) 367.8,1447.8 ; U2.63@320,1428 ccw(c320,1495.6) 367.8,1447.8 ; U2.63@336,1400 cw(c374.63,1400) 347.31,1427.31 ; U2.63@336,1400 cw(c374.63,1400) 347.31,1427.31 ; U2.63@336,1400 cw(c374.63,1400) 347.31,1427.31 ; U2.63@336,1400 cw(c374.63,1400) 347.31,1427.31 ; U2.63@342,1400 cw(c395.11,1400) 357.56,1437.56 ; U2.63@342,1400 cw(c395.11,1400) 357.56,1437.56 ; U2.63@342,1400 cw(c395.11,1400) 357.56,1437.56 ; U2.63@342,1400 cw(c395.11,1400) 357.56,1437.56 ; U2.63@348,1400 cw(c415.6,1400) 367.8,1447.8 ; U2.63@348,1400 cw(c415.6,1400) 367.8,1447.8 ; U2.63@348,1400 cw(c415.6,1400) 367.8,1447.8 ; U2.63@348,1400 cw(c415.6,1400) 367.8,1447.8 ; 1041.18,1340 ccw(c1041.18,1405.91) U1.37@1087.78,1359.3 ; 1041.18,1340 ccw(c1041.18,1405.91) U1.37@1087.78,1359.3 ; 1041.18,1340 ccw(c1041.18,1405.91) U1.37@1087.78,1359.3 ; 1041.18,1340 ccw(c1041.18,1405.91) U1.37@1087.78,1359.3 ; 1055.66,1340 ccw(c1055.66,1391.42) U1.37@1092.03,1355.06 ; 1055.66,1340 ccw(c1055.66,1391.42) U1.37@1092.03,1355.06 ; 1055.66,1340 ccw(c1055.66,1391.42) U1.37@1092.03,1355.06 ; 1055.66,1340 ccw(c1055.66,1391.42) U1.37@1092.03,1355.06 ; 1070.15,1340 ccw(c1070.15,1376.94) U1.37@1096.27,1350.82 ; 1070.15,1340 ccw(c1070.15,1376.94) U1.37@1096.27,1350.82 ; 1070.15,1340 ccw(c1070.15,1376.94) U1.37@1096.27,1350.82 ; 1070.15,1340 ccw(c1070.15,1376.94) U1.37@1096.27,1350.82
PE5: U1.38 U2.64 | length 2317
  Top Layer w6: U2.64@420,1400 550,1400 610,1340 1045,1340 1065,1320 1194.88,1320 U1.38@1204.09,1329.21 ; U2.64@431.31,1388.69 cw(c458.63,1361.37) 458.63,1400 ; U2.64@431.31,1388.69 cw(c458.63,1361.37) 458.63,1400 ; U2.64@431.31,1388.69 cw(c458.63,1361.37) 458.63,1400 ; U2.64@431.31,1388.69 cw(c458.63,1361.37) 458.63,1400 ; U2.64@431.31,1411.31 ccw(c458.63,1438.63) 458.63,1400 ; U2.64@431.31,1411.31 ccw(c458.63,1438.63) 458.63,1400 ; U2.64@431.31,1411.31 ccw(c458.63,1438.63) 458.63,1400 ; U2.64@431.31,1411.31 ccw(c458.63,1438.63) 458.63,1400 ; U2.64@435.56,1384.44 cw(c473.11,1346.89) 473.11,1400 ; U2.64@435.56,1384.44 cw(c473.11,1346.89) 473.11,1400 ; U2.64@435.56,1384.44 cw(c473.11,1346.89) 473.11,1400 ; U2.64@435.56,1384.44 cw(c473.11,1346.89) 473.11,1400 ; U2.64@435.56,1415.56 ccw(c473.11,1453.11) 473.11,1400 ; U2.64@435.56,1415.56 ccw(c473.11,1453.11) 473.11,1400 ; U2.64@435.56,1415.56 ccw(c473.11,1453.11) 473.11,1400 ; U2.64@435.56,1415.56 ccw(c473.11,1453.11) 473.11,1400 ; U2.64@439.8,1380.2 cw(c487.6,1332.4) 487.6,1400 ; U2.64@439.8,1380.2 cw(c487.6,1332.4) 487.6,1400 ; U2.64@439.8,1380.2 cw(c487.6,1332.4) 487.6,1400 ; U2.64@439.8,1380.2 cw(c487.6,1332.4) 487.6,1400 ; U2.64@439.8,1419.8 ccw(c487.6,1467.6) 487.6,1400 ; U2.64@439.8,1419.8 ccw(c487.6,1467.6) 487.6,1400 ; U2.64@439.8,1419.8 ccw(c487.6,1467.6) 487.6,1400 ; U2.64@439.8,1419.8 ccw(c487.6,1467.6) 487.6,1400 ; 1140.42,1320 ccw(c1140.42,1386.98) U1.38@1187.78,1339.62 ; 1140.42,1320 ccw(c1140.42,1386.98) U1.38@1187.78,1339.62 ; 1140.42,1320 ccw(c1140.42,1386.98) U1.38@1187.78,1339.62 ; 1140.42,1320 ccw(c1140.42,1386.98) U1.38@1187.78,1339.62 ; 1154.9,1320 ccw(c1154.9,1372.5) U1.38@1192.03,1335.38 ; 1154.9,1320 ccw(c1154.9,1372.5) U1.38@1192.03,1335.38 ; 1154.9,1320 ccw(c1154.9,1372.5) U1.38@1192.03,1335.38 ; 1154.9,1320 ccw(c1154.9,1372.5) U1.38@1192.03,1335.38 ; 1169.39,1320 ccw(c1169.39,1358.01) U1.38@1196.27,1331.13 ; 1169.39,1320 ccw(c1169.39,1358.01) U1.38@1196.27,1331.13 ; 1169.39,1320 ccw(c1169.39,1358.01) U1.38@1196.27,1331.13 ; 1169.39,1320 ccw(c1169.39,1358.01) U1.38@1196.27,1331.13
PE6: U1.39 U2.65 | length 1551.6
  Top Layer w10: U2.65@320,1300 370,1350 545,1350 585.47,1309.53 U1.39@1004.09,1309.53 ; U2.65@320,1316 ccw(c320,1354.63) 347.31,1327.31 ; U2.65@320,1316 ccw(c320,1354.63) 347.31,1327.31 ; U2.65@320,1316 ccw(c320,1354.63) 347.31,1327.31 ; U2.65@320,1316 ccw(c320,1354.63) 347.31,1327.31 ; U2.65@320,1326 ccw(c320,1388.77) 364.38,1344.38 ; U2.65@320,1326 ccw(c320,1388.77) 364.38,1344.38 ; U2.65@320,1326 ccw(c320,1388.77) 364.38,1344.38 ; U2.65@320,1326 ccw(c320,1388.77) 364.38,1344.38 ; U2.65@336,1300 cw(c374.63,1300) 347.31,1327.31 ; U2.65@336,1300 cw(c374.63,1300) 347.31,1327.31 ; U2.65@336,1300 cw(c374.63,1300) 347.31,1327.31 ; U2.65@336,1300 cw(c374.63,1300) 347.31,1327.31 ; U2.65@346,1300 cw(c408.77,1300) 364.38,1344.38 ; U2.65@346,1300 cw(c408.77,1300) 364.38,1344.38 ; U2.65@346,1300 cw(c408.77,1300) 364.38,1344.38 ; U2.65@346,1300 cw(c408.77,1300) 364.38,1344.38 ; 967.49,1309.53 cw(c967.49,1278.83) U1.39@989.2,1300.54 ; 967.49,1309.53 ccw(c967.49,1340.23) U1.39@989.2,1318.52 ; 967.49,1309.53 cw(c967.49,1278.83) U1.39@989.2,1300.54 ; 967.49,1309.53 ccw(c967.49,1340.23) U1.39@989.2,1318.52 ; 967.49,1309.53 ccw(c967.49,1340.23) U1.39@989.2,1318.52 ; 967.49,1309.53 cw(c967.49,1278.83) U1.39@989.2,1300.54 ; 967.49,1309.53 ccw(c967.49,1340.23) U1.39@989.2,1318.52 ; 967.49,1309.53 cw(c967.49,1278.83) U1.39@989.2,1300.54
PE7: U1.40 U2.66 | length 2293.3
  Top Layer w6: U2.66@420,1300 510,1300 530,1280 1094.25,1280 U1.40@1104.09,1289.84 ; U2.66@431.31,1288.69 cw(c458.63,1261.37) 458.63,1300 ; U2.66@431.31,1288.69 cw(c458.63,1261.37) 458.63,1300 ; U2.66@431.31,1288.69 cw(c458.63,1261.37) 458.63,1300 ; U2.66@431.31,1288.69 cw(c458.63,1261.37) 458.63,1300 ; U2.66@431.31,1311.31 ccw(c458.63,1338.63) 458.63,1300 ; U2.66@431.31,1311.31 ccw(c458.63,1338.63) 458.63,1300 ; U2.66@431.31,1311.31 ccw(c458.63,1338.63) 458.63,1300 ; U2.66@431.31,1311.31 ccw(c458.63,1338.63) 458.63,1300 ; U2.66@435.56,1284.44 cw(c473.11,1246.89) 473.11,1300 ; U2.66@435.56,1284.44 cw(c473.11,1246.89) 473.11,1300 ; U2.66@435.56,1284.44 cw(c473.11,1246.89) 473.11,1300 ; U2.66@435.56,1284.44 cw(c473.11,1246.89) 473.11,1300 ; U2.66@435.56,1315.56 ccw(c473.11,1353.11) 473.11,1300 ; U2.66@435.56,1315.56 ccw(c473.11,1353.11) 473.11,1300 ; U2.66@435.56,1315.56 ccw(c473.11,1353.11) 473.11,1300 ; U2.66@435.56,1315.56 ccw(c473.11,1353.11) 473.11,1300 ; U2.66@439.8,1280.2 cw(c487.6,1232.4) 487.6,1300 ; U2.66@439.8,1280.2 cw(c487.6,1232.4) 487.6,1300 ; U2.66@439.8,1280.2 cw(c487.6,1232.4) 487.6,1300 ; U2.66@439.8,1280.2 cw(c487.6,1232.4) 487.6,1300 ; U2.66@439.8,1319.8 ccw(c487.6,1367.6) 487.6,1300 ; U2.66@439.8,1319.8 ccw(c487.6,1367.6) 487.6,1300 ; U2.66@439.8,1319.8 ccw(c487.6,1367.6) 487.6,1300 ; U2.66@439.8,1319.8 ccw(c487.6,1367.6) 487.6,1300 ; 1038.9,1280 ccw(c1038.9,1349.13) U1.40@1087.78,1300.25 ; 1038.9,1280 ccw(c1038.9,1349.13) U1.40@1087.78,1300.25 ; 1038.9,1280 ccw(c1038.9,1349.13) U1.40@1087.78,1300.25 ; 1038.9,1280 ccw(c1038.9,1349.13) U1.40@1087.78,1300.25 ; 1053.38,1280 ccw(c1053.38,1334.65) U1.40@1092.03,1296.01 ; 1053.38,1280 ccw(c1053.38,1334.65) U1.40@1092.03,1296.01 ; 1053.38,1280 ccw(c1053.38,1334.65) U1.40@1092.03,1296.01 ; 1053.38,1280 ccw(c1053.38,1334.65) U1.40@1092.03,1296.01 ; 1067.87,1280 ccw(c1067.87,1320.16) U1.40@1096.27,1291.76 ; 1067.87,1280 ccw(c1067.87,1320.16) U1.40@1096.27,1291.76 ; 1067.87,1280 ccw(c1067.87,1320.16) U1.40@1096.27,1291.76 ; 1067.87,1280 ccw(c1067.87,1320.16) U1.40@1096.27,1291.76 ; 1082.35,1280 ccw(c1082.35,1305.68) U1.40@1100.51,1287.52 ; 1082.35,1280 ccw(c1082.35,1305.68) U1.40@1100.51,1287.52 ; 1082.35,1280 ccw(c1082.35,1305.68) U1.40@1100.51,1287.52 ; 1082.35,1280 ccw(c1082.35,1305.68) U1.40@1100.51,1287.52
PF0: U1.41 U2.67 | length 2540.1
  Bottom Layer w6: U2.67@320,1200 370,1250 580,1250 610,1280 1035,1280 1055,1260 1193.94,1260 U1.41@1204.09,1270.16 ; U2.67@320,1216 ccw(c320,1254.63) 347.31,1227.31 ; U2.67@320,1216 ccw(c320,1254.63) 347.31,1227.31 ; U2.67@320,1216 ccw(c320,1254.63) 347.31,1227.31 ; U2.67@320,1216 ccw(c320,1254.63) 347.31,1227.31 ; U2.67@320,1222 ccw(c320,1275.11) 357.56,1237.56 ; U2.67@320,1222 ccw(c320,1275.11) 357.56,1237.56 ; U2.67@320,1222 ccw(c320,1275.11) 357.56,1237.56 ; U2.67@320,1222 ccw(c320,1275.11) 357.56,1237.56 ; U2.67@320,1228 ccw(c320,1295.6) 367.8,1247.8 ; U2.67@320,1228 ccw(c320,1295.6) 367.8,1247.8 ; U2.67@320,1228 ccw(c320,1295.6) 367.8,1247.8 ; U2.67@320,1228 ccw(c320,1295.6) 367.8,1247.8 ; U2.67@336,1200 cw(c374.63,1200) 347.31,1227.31 ; U2.67@336,1200 cw(c374.63,1200) 347.31,1227.31 ; U2.67@336,1200 cw(c374.63,1200) 347.31,1227.31 ; U2.67@336,1200 cw(c374.63,1200) 347.31,1227.31 ; U2.67@342,1200 cw(c395.11,1200) 357.56,1237.56 ; U2.67@342,1200 cw(c395.11,1200) 357.56,1237.56 ; U2.67@342,1200 cw(c395.11,1200) 357.56,1237.56 ; U2.67@342,1200 cw(c395.11,1200) 357.56,1237.56 ; U2.67@348,1200 cw(c415.6,1200) 367.8,1247.8 ; U2.67@348,1200 cw(c415.6,1200) 367.8,1247.8 ; U2.67@348,1200 cw(c415.6,1200) 367.8,1247.8 ; U2.67@348,1200 cw(c415.6,1200) 367.8,1247.8 ; 1138.14,1260 ccw(c1138.14,1330.21) U1.41@1187.78,1280.56 ; 1138.14,1260 ccw(c1138.14,1330.21) U1.41@1187.78,1280.56 ; 1138.14,1260 ccw(c1138.14,1330.21) U1.41@1187.78,1280.56 ; 1138.14,1260 ccw(c1138.14,1330.21) U1.41@1187.78,1280.56 ; 1152.62,1260 ccw(c1152.62,1315.72) U1.41@1192.03,1276.32 ; 1152.62,1260 ccw(c1152.62,1315.72) U1.41@1192.03,1276.32 ; 1152.62,1260 ccw(c1152.62,1315.72) U1.41@1192.03,1276.32 ; 1152.62,1260 ccw(c1152.62,1315.72) U1.41@1192.03,1276.32 ; 1167.11,1260 ccw(c1167.11,1301.24) U1.41@1196.27,1272.08 ; 1167.11,1260 ccw(c1167.11,1301.24) U1.41@1196.27,1272.08 ; 1167.11,1260 ccw(c1167.11,1301.24) U1.41@1196.27,1272.08 ; 1167.11,1260 ccw(c1167.11,1301.24) U1.41@1196.27,1272.08 ; 1181.59,1260 ccw(c1181.59,1286.75) U1.41@1200.51,1267.84 ; 1181.59,1260 ccw(c1181.59,1286.75) U1.41@1200.51,1267.84 ; 1181.59,1260 ccw(c1181.59,1286.75) U1.41@1200.51,1267.84 ; 1181.59,1260 ccw(c1181.59,1286.75) U1.41@1200.51,1267.84
PF1: U1.42 U2.68 | length 1435
  Top Layer w10: U2.68@420,1200 525,1200 575.47,1250.47 U1.42@1004.09,1250.47 ; U2.68@431.31,1188.69 cw(c458.63,1161.37) 458.63,1200 ; U2.68@431.31,1188.69 cw(c458.63,1161.37) 458.63,1200 ; U2.68@431.31,1188.69 cw(c458.63,1161.37) 458.63,1200 ; U2.68@431.31,1188.69 cw(c458.63,1161.37) 458.63,1200 ; U2.68@431.31,1211.31 ccw(c458.63,1238.63) 458.63,1200 ; U2.68@431.31,1211.31 ccw(c458.63,1238.63) 458.63,1200 ; U2.68@431.31,1211.31 ccw(c458.63,1238.63) 458.63,1200 ; U2.68@431.31,1211.31 ccw(c458.63,1238.63) 458.63,1200 ; U2.68@438.38,1181.62 cw(c482.77,1137.23) 482.77,1200 ; U2.68@438.38,1181.62 cw(c482.77,1137.23) 482.77,1200 ; U2.68@438.38,1181.62 cw(c482.77,1137.23) 482.77,1200 ; U2.68@438.38,1181.62 cw(c482.77,1137.23) 482.77,1200 ; U2.68@438.38,1218.38 ccw(c482.77,1262.77) 482.77,1200 ; U2.68@438.38,1218.38 ccw(c482.77,1262.77) 482.77,1200 ; U2.68@438.38,1218.38 ccw(c482.77,1262.77) 482.77,1200 ; U2.68@438.38,1218.38 ccw(c482.77,1262.77) 482.77,1200 ; 967.49,1250.47 cw(c967.49,1219.77) U1.42@989.2,1241.48 ; 967.49,1250.47 ccw(c967.49,1281.17) U1.42@989.2,1259.46 ; 967.49,1250.47 cw(c967.49,1219.77) U1.42@989.2,1241.48 ; 967.49,1250.47 ccw(c967.49,1281.17) U1.42@989.2,1259.46 ; 967.49,1250.47 ccw(c967.49,1281.17) U1.42@989.2,1259.46 ; 967.49,1250.47 cw(c967.49,1219.77) U1.42@989.2,1241.48 ; 967.49,1250.47 ccw(c967.49,1281.17) U1.42@989.2,1259.46 ; 967.49,1250.47 cw(c967.49,1219.77) U1.42@989.2,1241.48
PF2: U1.43 U2.69 | length 2475.7
  Bottom Layer w6: U2.69@320,1100 370,1150 510,1150 580,1220 1093.31,1220 U1.43@1104.09,1230.79 ; U2.69@320,1116 ccw(c320,1154.63) 347.31,1127.31 ; U2.69@320,1116 ccw(c320,1154.63) 347.31,1127.31 ; U2.69@320,1116 ccw(c320,1154.63) 347.31,1127.31 ; U2.69@320,1116 ccw(c320,1154.63) 347.31,1127.31 ; U2.69@320,1122 ccw(c320,1175.11) 357.56,1137.56 ; U2.69@320,1122 ccw(c320,1175.11) 357.56,1137.56 ; U2.69@320,1122 ccw(c320,1175.11) 357.56,1137.56 ; U2.69@320,1122 ccw(c320,1175.11) 357.56,1137.56 ; U2.69@320,1128 ccw(c320,1195.6) 367.8,1147.8 ; U2.69@320,1128 ccw(c320,1195.6) 367.8,1147.8 ; U2.69@320,1128 ccw(c320,1195.6) 367.8,1147.8 ; U2.69@320,1128 ccw(c320,1195.6) 367.8,1147.8 ; U2.69@336,1100 cw(c374.63,1100) 347.31,1127.31 ; U2.69@336,1100 cw(c374.63,1100) 347.31,1127.31 ; U2.69@336,1100 cw(c374.63,1100) 347.31,1127.31 ; U2.69@336,1100 cw(c374.63,1100) 347.31,1127.31 ; U2.69@342,1100 cw(c395.11,1100) 357.56,1137.56 ; U2.69@342,1100 cw(c395.11,1100) 357.56,1137.56 ; U2.69@342,1100 cw(c395.11,1100) 357.56,1137.56 ; U2.69@342,1100 cw(c395.11,1100) 357.56,1137.56 ; U2.69@348,1100 cw(c415.6,1100) 367.8,1147.8 ; U2.69@348,1100 cw(c415.6,1100) 367.8,1147.8 ; U2.69@348,1100 cw(c415.6,1100) 367.8,1147.8 ; U2.69@348,1100 cw(c415.6,1100) 367.8,1147.8 ; 1036.62,1220 ccw(c1036.62,1292.36) U1.43@1087.78,1241.19 ; 1036.62,1220 ccw(c1036.62,1292.36) U1.43@1087.78,1241.19 ; 1036.62,1220 ccw(c1036.62,1292.36) U1.43@1087.78,1241.19 ; 1036.62,1220 ccw(c1036.62,1292.36) U1.43@1087.78,1241.19 ; 1051.1,1220 ccw(c1051.1,1277.87) U1.43@1092.03,1236.95 ; 1051.1,1220 ccw(c1051.1,1277.87) U1.43@1092.03,1236.95 ; 1051.1,1220 ccw(c1051.1,1277.87) U1.43@1092.03,1236.95 ; 1051.1,1220 ccw(c1051.1,1277.87) U1.43@1092.03,1236.95 ; 1065.59,1220 ccw(c1065.59,1263.39) U1.43@1096.27,1232.71 ; 1065.59,1220 ccw(c1065.59,1263.39) U1.43@1096.27,1232.71 ; 1065.59,1220 ccw(c1065.59,1263.39) U1.43@1096.27,1232.71 ; 1065.59,1220 ccw(c1065.59,1263.39) U1.43@1096.27,1232.71 ; 1080.07,1220 ccw(c1080.07,1248.9) U1.43@1100.51,1228.47 ; 1080.07,1220 ccw(c1080.07,1248.9) U1.43@1100.51,1228.47 ; 1080.07,1220 ccw(c1080.07,1248.9) U1.43@1100.51,1228.47 ; 1080.07,1220 ccw(c1080.07,1248.9) U1.43@1100.51,1228.47
PF3: U1.44 U2.70 | length 2454.7
  Top Layer w6: U2.70@420,1100 488,1100 609,1221 1034,1221 1054,1201 1193.99,1201 U1.44@1204.09,1211.1 ; U2.70@431.31,1088.69 cw(c458.63,1061.37) 458.63,1100 ; U2.70@431.31,1088.69 cw(c458.63,1061.37) 458.63,1100 ; U2.70@431.31,1088.69 cw(c458.63,1061.37) 458.63,1100 ; U2.70@431.31,1088.69 cw(c458.63,1061.37) 458.63,1100 ; U2.70@431.31,1111.31 ccw(c458.63,1138.63) 458.63,1100 ; U2.70@431.31,1111.31 ccw(c458.63,1138.63) 458.63,1100 ; U2.70@431.31,1111.31 ccw(c458.63,1138.63) 458.63,1100 ; U2.70@431.31,1111.31 ccw(c458.63,1138.63) 458.63,1100 ; U2.70@435.56,1084.44 cw(c473.11,1046.89) 473.11,1100 ; U2.70@435.56,1084.44 cw(c473.11,1046.89) 473.11,1100 ; U2.70@435.56,1084.44 cw(c473.11,1046.89) 473.11,1100 ; U2.70@435.56,1084.44 cw(c473.11,1046.89) 473.11,1100 ; U2.70@435.56,1115.56 ccw(c473.11,1153.11) 473.11,1100 ; U2.70@435.56,1115.56 ccw(c473.11,1153.11) 473.11,1100 ; U2.70@435.56,1115.56 ccw(c473.11,1153.11) 473.11,1100 ; U2.70@435.56,1115.56 ccw(c473.11,1153.11) 473.11,1100 ; U2.70@439.8,1080.2 cw(c487.6,1032.4) 487.6,1100 ; U2.70@439.8,1080.2 cw(c487.6,1032.4) 487.6,1100 ; U2.70@439.8,1080.2 cw(c487.6,1032.4) 487.6,1100 ; U2.70@439.8,1080.2 cw(c487.6,1032.4) 487.6,1100 ; U2.70@439.8,1119.8 ccw(c487.6,1167.6) 487.6,1100 ; U2.70@439.8,1119.8 ccw(c487.6,1167.6) 487.6,1100 ; U2.70@439.8,1119.8 ccw(c487.6,1167.6) 487.6,1100 ; U2.70@439.8,1119.8 ccw(c487.6,1167.6) 487.6,1100 ; 1138.27,1201 ccw(c1138.27,1271.02) U1.44@1187.78,1221.51 ; 1138.27,1201 ccw(c1138.27,1271.02) U1.44@1187.78,1221.51 ; 1138.27,1201 ccw(c1138.27,1271.02) U1.44@1187.78,1221.51 ; 1138.27,1201 ccw(c1138.27,1271.02) U1.44@1187.78,1221.51 ; 1152.76,1201 ccw(c1152.76,1256.54) U1.44@1192.03,1217.27 ; 1152.76,1201 ccw(c1152.76,1256.54) U1.44@1192.03,1217.27 ; 1152.76,1201 ccw(c1152.76,1256.54) U1.44@1192.03,1217.27 ; 1152.76,1201 ccw(c1152.76,1256.54) U1.44@1192.03,1217.27 ; 1167.24,1201 ccw(c1167.24,1242.05) U1.44@1196.27,1213.02 ; 1167.24,1201 ccw(c1167.24,1242.05) U1.44@1196.27,1213.02 ; 1167.24,1201 ccw(c1167.24,1242.05) U1.44@1196.27,1213.02 ; 1167.24,1201 ccw(c1167.24,1242.05) U1.44@1196.27,1213.02 ; 1181.73,1201 ccw(c1181.73,1227.56) U1.44@1200.51,1208.78 ; 1181.73,1201 ccw(c1181.73,1227.56) U1.44@1200.51,1208.78 ; 1181.73,1201 ccw(c1181.73,1227.56) U1.44@1200.51,1208.78 ; 1181.73,1201 ccw(c1181.73,1227.56) U1.44@1200.51,1208.78